# EAGLE board RX - Copy (EAGLE 9.5.0)
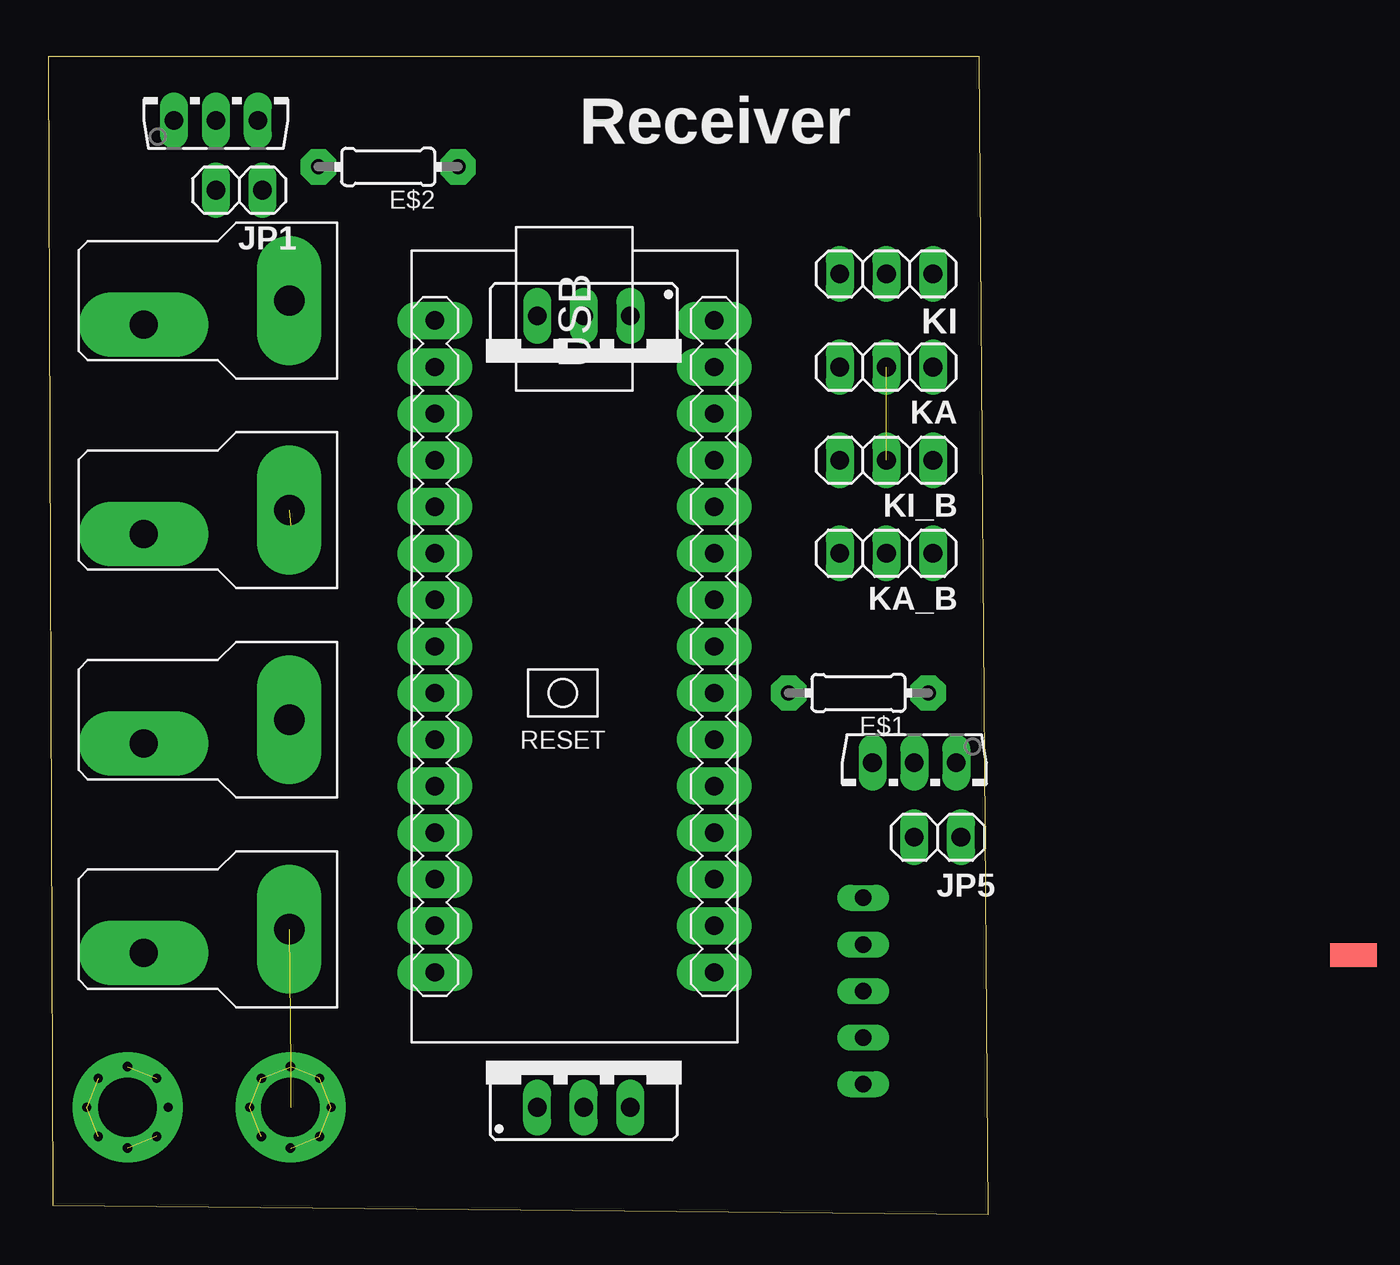
[diagram p0: board, top side]
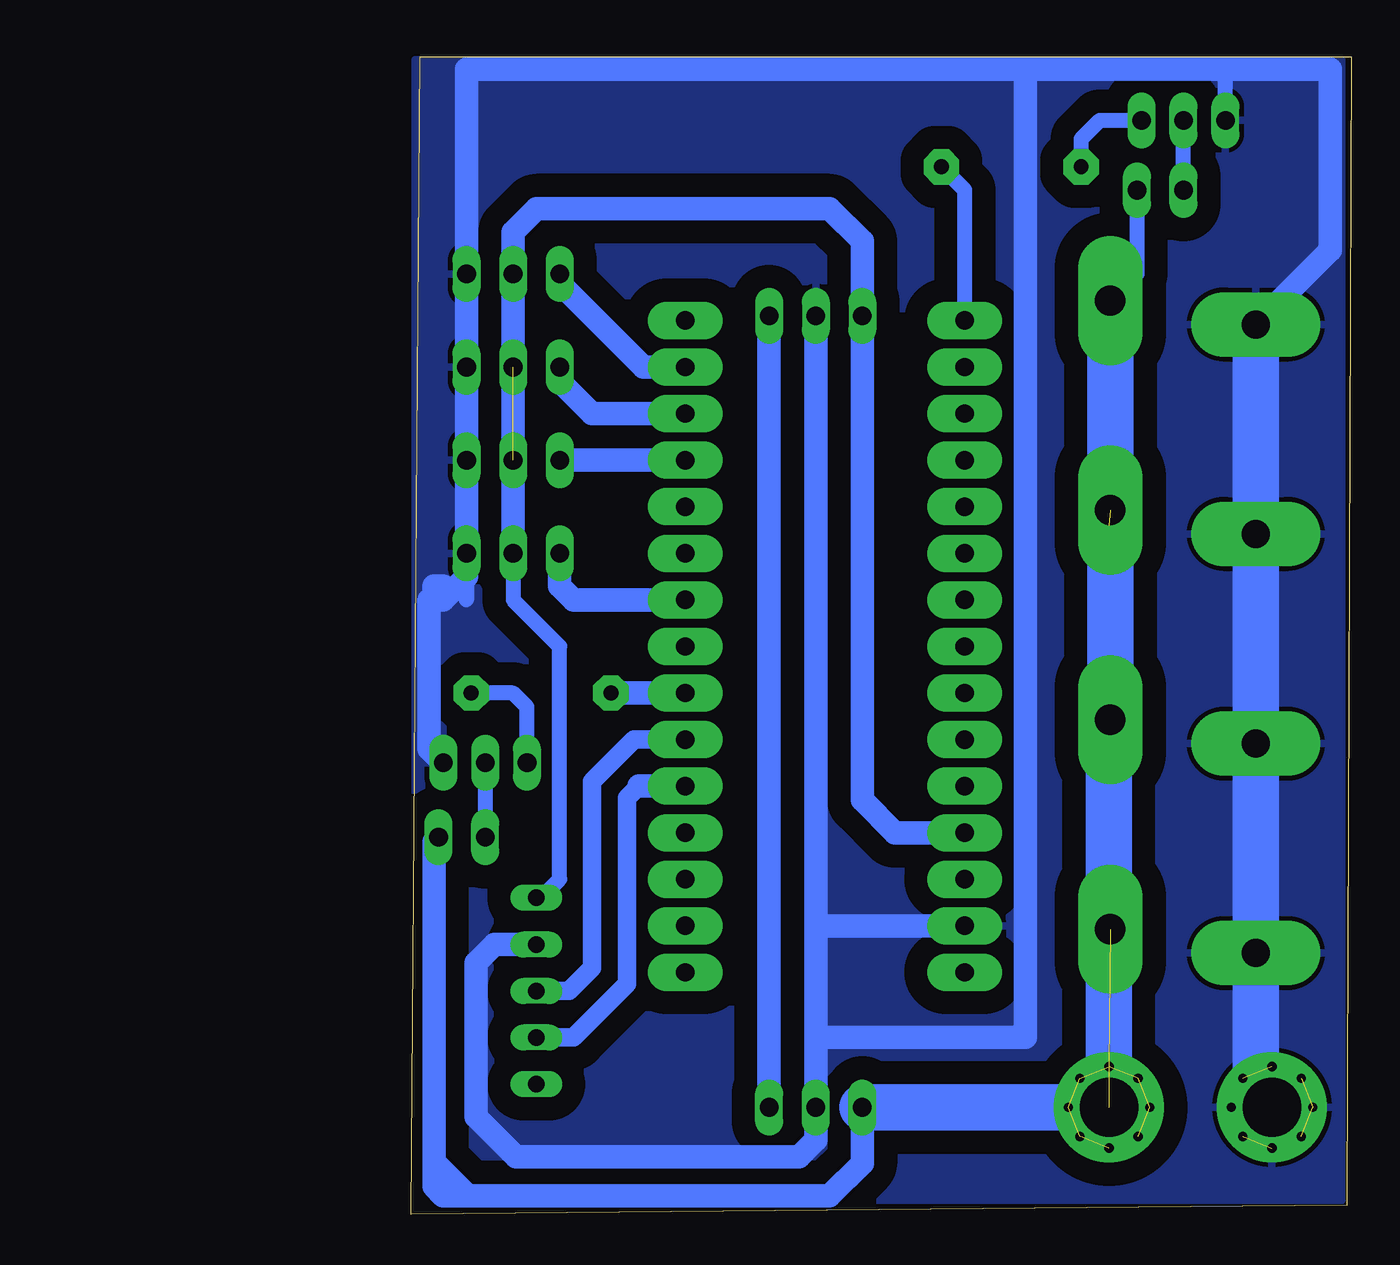
[diagram p1: board, bottom side, seen from below]

Size 51.29 x 63.17 mm. Coordinates in mm from the lower left corner, seen from the top.
Outline: 0.25,0.51 51.29,0 50.78,63.17 0,63.17 0.25,0.51
Copper layers (1*16): Top 0.035mm / dielectric 1.5mm / Bottom 0.035mm
Design rules "default *": minimum track width 6mil, minimum drill 0.35mm, track to track 24mil, track to pad 24mil, pad to pad 24mil, via to via 24mil, smd to smd 24mil, copper to edge 0mil, drill to drill 6mil, minimum pad ring 10mil, minimum via ring 8mil, stop-mask expansion 4mil, vias tented up to drill 0mil, thermal gap 10mil

## Footprints (pad centres in the part's own frame; a part is rotated, then mirrored left to right if it is on the bottom)
0204/7 = drill 0.813 pad 1.93 octagon: 1 -3.81,0; 2 3.81,0
3MM_HOLE = drill 3.2 pad 6: P$1 0,0 | drill 0.5 pad 0.61: P$2 0,2.223; P$3 0,-2.223; P$4 2.223,0; P$5 -2.223,0; P$6 -1.587,1.587; P$7 1.587,1.587; P$8 1.587,-1.587; P$9 -1.587,-1.587
78XXS = drill 1.016 long: GND 0,-2.54; IN -2.54,-2.54; OUT 2.54,-2.54
1X02 = drill 1.016 long: 1 -1.27,0; 2 1.27,0
1X03 = drill 1.016 long: 1 -2.54,0; 2 0,0; 3 2.54,0
ARDUINO-NANO-3.0 = drill 1 pad 2.032 long: J1.1 17.78,7.62; J1.2 15.24,7.62; J1.3 12.7,7.62; J1.4 10.16,7.62; J1.5 7.62,7.62; J1.6 5.08,7.62; J1.7 2.54,7.62; J1.8 0,7.62; J1.9 -2.54,7.62; J1.10 -5.08,7.62; J1.11 -7.62,7.62; J1.12 -10.16,7.62; J1.13 -12.7,7.62; J1.14 -15.24,7.62; J1.15 -17.78,7.62; J2.1 17.78,-7.62; J2.2 15.24,-7.62; J2.3 12.7,-7.62; J2.4 10.16,-7.62; J2.5 7.62,-7.62; J2.6 5.08,-7.62; J2.7 2.54,-7.62; J2.8 0,-7.62; J2.9 -2.54,-7.62; J2.10 -5.08,-7.62; J2.11 -7.62,-7.62; J2.12 -10.16,-7.62; J2.13 -12.7,-7.62; J2.14 -15.24,-7.62; J2.15 -17.78,-7.62
TO126AV = drill 1.016 long: B 2.286,-1.27; C 0,-1.27; E -2.286,-1.27
T_PLUG_CONNECTOR = drill 1.651 pad 3.531 long: P-1 2.6,4.248 | drill 1.524 pad 3.531 long: P-2 10.55,5.55
HC-12_FOOTPRINT = smd 2.54 x 1.27: ANT 25.49,7.03 | smd 0.406 x 0.203 bottom: GND -1.27,7.62; RXD -1.27,5.08; SET -1.27,0; TXD -1.27,2.54 | drill 0.9 pad 1.27 long: P$1 -1.27,10.16; P$2 -1.27,7.62; P$3 -1.27,5.08; P$4 -1.27,2.54; P$5 -1.27,0 | smd 0.305 x 0.152 bottom: VCC -1.27,10.16

## Placement (x,y rotation side)
E$1  [0204/7]  44.2,28.45 180 top
E$2  [0204/7]  18.54,57.15 180 top
H1  3MM_HOLE  [3MM_HOLE]  13.21,5.84 0 top
H2  3MM_HOLE  [3MM_HOLE]  4.32,5.84 0 top
IC1  [78XXS]  29.21,8.38 0 top
IC2  [78XXS]  29.21,46.48 180 top
JP1  [1X02]  10.41,55.88 0 top
JP5  [1X02]  48.51,20.57 0 top
KA  [1X03]  45.72,46.23 180 top
KA_B  [1X03]  45.72,36.07 180 top
KI  [1X03]  45.72,51.31 180 top
KI_B  [1X03]  45.72,41.15 180 top
M1  ARDUINO-NANO-3.0  [ARDUINO-NANO-3.0]  28.7,30.99 270 top
Q1  BD139  [TO126AV]  47.24,23.37 180 top
Q2  BD139  [TO126AV]  9.14,60.96 0 top
U$1  T-PLUG_CONNECTOR  [T_PLUG_CONNECTOR]  15.75,19.81 180 top
U$2  T-PLUG_CONNECTOR  [T_PLUG_CONNECTOR]  15.75,31.24 180 top
U$3  T-PLUG_CONNECTOR  [T_PLUG_CONNECTOR]  15.75,42.67 180 top
U$4  T-PLUG_CONNECTOR  [T_PLUG_CONNECTOR]  15.75,54.1 180 top
U$5  HC-12_FOOTPRINT  [HC-12_FOOTPRINT]  45.72,7.11 0 top

## Library data of the parts
E$1 E$2 = rcl
H1 H2 = 3mm_special_hole
IC1 IC2 = v-reg
JP1 JP5 KA KA_B KI KI_B = pinhead
M1 = diy-modules
Q1 Q2 = transistor-power
U$1-U$4 = con-T-plug
U$5 = hc12_433mhz

## Nets
3V3: M1.J2.14
5V: IC2.OUT KA.2 KA_B.2 KI.2 KI_B.2 M1.J2.4 U$5.VCC
GND: H2.P$1 H2.P$2 H2.P$3 H2.P$4 H2.P$5 H2.P$6 H2.P$7 H2.P$8 H2.P$9 IC1.GND IC2.GND KA.1 KA_B.1 KI.1 KI_B.1 M1.J2.2 Q1.E Q2.E U$1.P-2 U$2.P-2 U$3.P-2 U$4.P-2 U$5.GND
GND.1: M1.J1.4
N$2: IC1.OUT IC2.IN
N$4: M1.J2.1
N$8: U$5.SET
PIN_6: KA_B.3 M1.J1.9
PIN_9: KI_B.3 M1.J1.12
PIN_10: KA.3 M1.J1.13
PIN_11: KI.3 M1.J1.14
RXD: M1.J1.6 U$5.RXD
S$1: JP5.1 Q1.C
S$2: E$1.2 M1.J1.7
S$3: E$1.1 Q1.B
S$4: JP1.1 Q2.C
S$5: E$2.2 Q2.B
S$6: E$2.1 M1.J2.15
TXD: M1.J1.5 U$5.TXD
VCC: H1.P$1 H1.P$2 H1.P$3 H1.P$4 H1.P$5 H1.P$6 H1.P$7 H1.P$8 H1.P$9 IC1.IN JP1.2 JP5.2 U$1.P-1 U$2.P-1 U$3.P-1 U$4.P-1

## Tracks (layer width: path | path; a pad name or v marks a point on that pad's centre or on a via)
5V  (1 unrouted)
  Top 0.406: KA_B.2 45.72,34.8
  Bottom 0.813: KA_B.2 45.72,33.53 43.18,30.99 43.18,18.29 44.2,17.27 U$5.VCC
  Bottom 1.27: M1.J2.4 24.89,20.83 26.67,22.61 26.67,28.19 IC2.OUT 26.67,53.09 28.45,54.86 44.45,54.86 45.72,53.59 KI.2 KI_B.2 KA_B.2
GND  (4 unrouted)
  Bottom 0.813: KA_B.1 48.26,33.53 | Q2.E 6.86,62.23 7.11,62.48
  Bottom 1.27: IC2.GND 29.21,28.19 29.21,15.75 | 29.21,15.75 29.21,11.94 29.21,9.65 | 29.21,9.65 IC1.GND 29.21,4.06 30.12,3.15 45.57,3.15 47.75,5.33 47.75,13.72 46.74,14.73 U$5.GND | M1.J2.2 29.21,15.75 | U$4.P-2 1.13,52.62 1.13,62.48 7.11,62.48 17.78,62.48 | 17.78,62.48 48.26,62.48 KI.1 KA.1 KI_B.1 KA_B.1 48.26,34.8 49.53,33.53 49.53,34.29 50.04,34.29 50.04,33.78 50.29,33.53 50.29,25.4 Q1.E | 17.78,62.48 17.78,9.65 29.21,9.65
  Bottom 2.54: U$4.P-2 U$3.P-2 U$2.P-2 5.2,15.12 5.33,14.99 5.33,14.4 U$1.P-2 5.2,6.72 H2.P$1
  pour Bottom (isolate 1.27): 0.51,62.99 51.05,62.99 51.05,0.76 0.51,0.76
N$2
  Bottom 1.27: IC2.IN 31.75,11.94 IC1.OUT
PIN_6
  Bottom 1.27: M1.J1.9 42.42,33.53 43.18,34.29 KA_B.3
PIN_9
  Bottom 1.27: M1.J1.12 KI_B.3
PIN_10
  Bottom 1.27: M1.J1.13 41.4,43.69 43.18,45.47 KA.3
PIN_11
  Bottom 1.27: M1.J1.14 38.61,46.23 43.18,50.8 KI.3
RXD
  Bottom 1.016: M1.J1.6 39.12,25.91 41.4,23.62 41.4,13.46 42.67,12.19 U$5.RXD
S$1
  Bottom 0.813: Q1.C JP5.1
S$2
  Bottom 1.27: M1.J1.7 E$1.2
S$3
  Bottom 0.813: Q1.B 44.96,27.69 45.72,28.45 E$1.1
S$4
  Bottom 0.813: JP1.1 Q2.C
S$5
  Bottom 0.813: E$2.2 14.73,58.67 13.72,59.69 Q2.B
S$6
  Bottom 0.813: M1.J2.15 21.08,55.88 E$2.1
TXD
  Bottom 1.016: 38.86,23.37 39.5,22.73 39.5,12.57 42.42,9.65 U$5.TXD
  Bottom 1.27: M1.J1.5 38.86,23.37
VCC  (10 unrouted)
  Bottom 0.813: JP1.2 11.68,51.32 U$4.P-1
  Bottom 1.016: 50.04,3.05 48.26,1.27
  Bottom 1.27: IC1.IN 26.67,2.79 28.45,1.02 49.53,1.02 50.04,1.52 50.04,3.05 50.04,20.32 JP5.2
  Bottom 2.54: U$4.P-1 13.15,37.65 13.21,37.59 | U$3.P-1 U$2.P-1 13.21,26.93 H1.P$1 IC1.IN

## Text on the board
tPlace: Receiver